# EAGLE board Spandan (EAGLE 7.7.0)
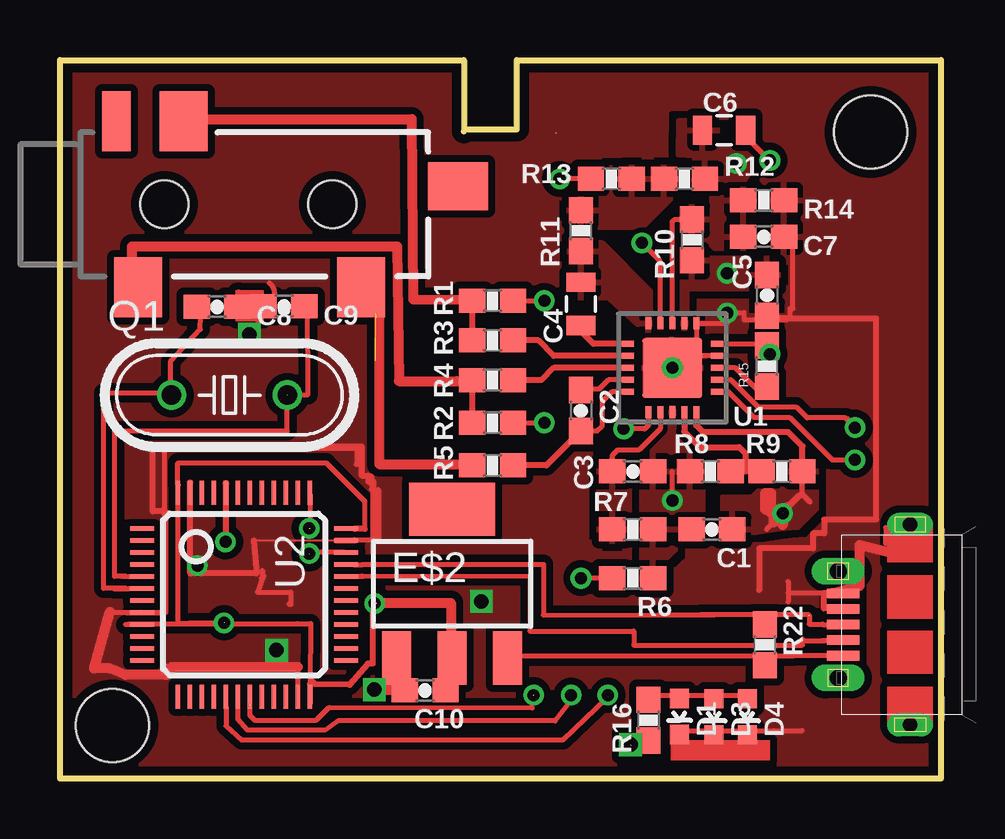
[diagram p0: board, top side]
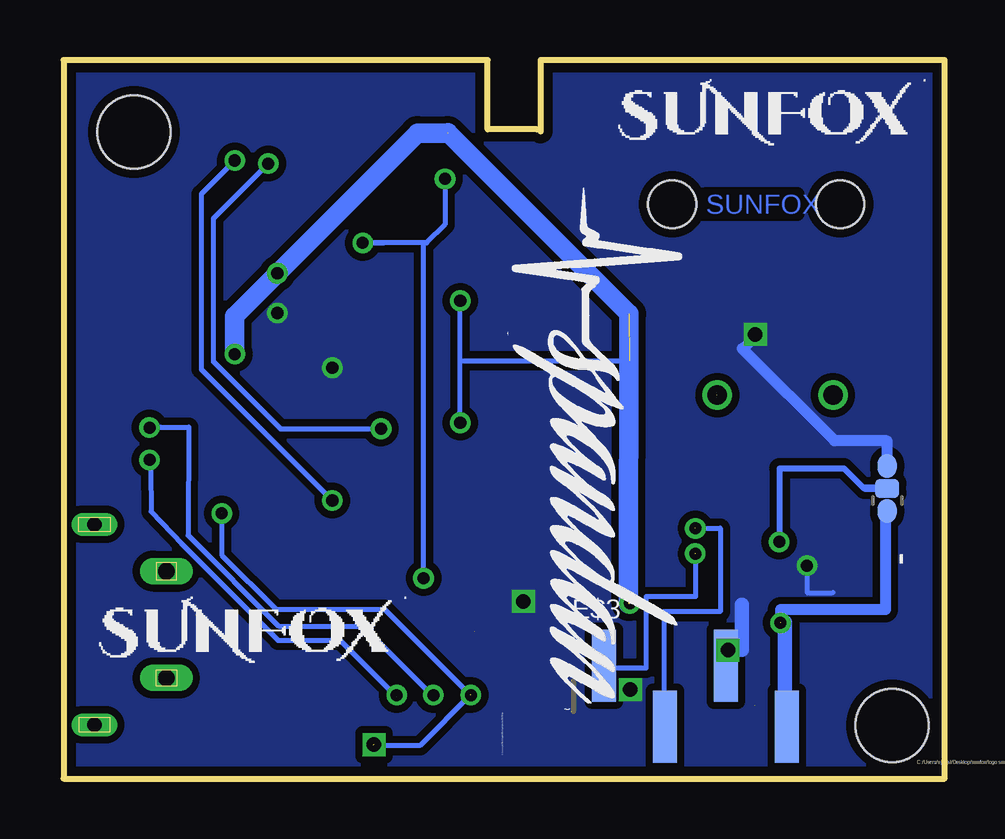
[diagram p1: board, bottom side, seen from below]

Size 36.73 x 29.95 mm. Coordinates in mm from the lower left corner, seen from the top.
Outline: 16.84,26.98 16.84,29.95 0,29.95 0,0 36.73,0 36.73,29.95 19.05,29.95 19.05,27.05 16.99,27.05
Copper layers (1*16): Top 0.0356mm / dielectric 1.5011mm / Bottom 0.0356mm
Design rules "LC_Eagle": minimum track width 8mil, minimum drill 10mil, track to track 8mil, track to pad 8mil, pad to pad 8mil, via to via 8mil, smd to smd 8mil, copper to edge 15mil, drill to drill 8mil, minimum pad ring 7mil, minimum via ring 7mil, stop-mask expansion 4mil, vias tented up to drill 0mil, thermal gap 10mil
Holes 3.05 mm at 33.8,26.94 2.19,2.22

## Footprints (pad centres in the part's own frame; a part is rotated, then mirrored left to right if it is on the bottom)
C0R-JMP = smd 0.8 x 1: 1 0,0.938; 3 0,-0.938 | smd 1 x 0.8: 2 0,0
0603-CAP = smd 1.1 x 1: 1 -0.85,0; 2 0.85,0
0805 = smd 0.8 x 1.2: 1 -0.9,0; 2 0.9,0
LED-0603 = smd 0.8 x 0.8: A 0,-0.75; C 0,0.75
47589-0001 = smd 1.35 x 0.4: 1 2.8,1.3; 2 2.8,0.65; 3 2.8,0; 4 2.8,-0.65; 5 2.8,-1.3 | drill 0.6 pad 0.95 long: CASING1 0,4.175; CASING2 0,-4.175 | drill 0.7 pad 1.1 long: CASING3 3,2.225; CASING4 3,-2.225
SOT223 = smd 1.219 x 2.235: 1 -2.311,-3.099; 2 0,-3.099; 3 2.311,-3.099 | smd 3.6 x 2.2: 4 0,3.099
1X04_SMT = smd 1 x 3: 1 -3.81,1.27; 2 -1.27,-1.27; 3 1.27,1.27; 4 3.81,-1.27
AUDIO-JACK-3.5MM-SMD = smd 2 x 2.5: RING 4.3,3.45; SLEEVE 2.4,-3.45; TIP 11.7,-3.45 | smd 1.2 x 2.5: RSH 1.5,3.45 | smd 2.5 x 2: TSH 15.75,0.75 | hole 2: 3.5,0; 10.5,0
HC49/S = drill 0.813: 1 -2.413,0; 2 2.413,0
0603-RES = smd 1.1 x 1: 1 -0.85,0; 2 0.85,0
LFCSP_20 = smd 0.5 x 0.25: 1 -1.85,1; 2 -1.85,0.5; 3 -1.85,0; 4 -1.85,-0.5; 5 -1.85,-1; 11 1.85,-1; 12 1.85,-0.5; 13 1.85,0; 14 1.85,0.5; 15 1.85,1 | smd 0.25 x 0.5: 6 -1,-1.85; 7 -0.5,-1.85; 8 0,-1.85; 9 0.5,-1.85; 10 1,-1.85; 16 1,1.85; 17 0.5,1.85; 18 0,1.85; 19 -0.5,1.85; 20 -1,1.85 | smd 2.5 x 2.5: PAD 0,0
LQFP48 = smd 0.2 x 1: 1 -2.75,-4.25; 2 -2.25,-4.25; 3 -1.75,-4.25; 4 -1.25,-4.25; 5 -0.75,-4.25; 6 -0.25,-4.25; 7 0.25,-4.25; 8 0.75,-4.25; 9 1.25,-4.25; 10 1.75,-4.25; 11 2.25,-4.25; 12 2.75,-4.25; 25 2.75,4.25; 26 2.25,4.25; 27 1.75,4.25; 28 1.25,4.25; 29 0.75,4.25; 30 0.25,4.25; 31 -0.25,4.25; 32 -0.75,4.25; 33 -1.25,4.25; 34 -1.75,4.25; 35 -2.25,4.25; 36 -2.75,4.25 | smd 1 x 0.2: 13 4.25,-2.75; 14 4.25,-2.25; 15 4.25,-1.75; 16 4.25,-1.25; 17 4.25,-0.75; 18 4.25,-0.25; 19 4.25,0.25; 20 4.25,0.75; 21 4.25,1.25; 22 4.25,1.75; 23 4.25,2.25; 24 4.25,2.75; 37 -4.25,2.75; 38 -4.25,2.25; 39 -4.25,1.75; 40 -4.25,1.25; 41 -4.25,0.75; 42 -4.25,0.25; 43 -4.25,-0.25; 44 -4.25,-0.75; 45 -4.25,-1.25; 46 -4.25,-1.75; 47 -4.25,-2.25; 48 -4.25,-2.75

## Placement (x,y rotation side)
'  [C0R-JMP]  2.39,12.1 180 bottom
C1  1.5nF  [0603-CAP]  27.18,10.39 180 top
C2  1nF  [0603-CAP]  21.72,15.34 270 top
C3  10nF  [0603-CAP]  23.88,12.8 180 top
C4  0.33uF  [0805]  21.72,19.79 90 top
C5  0.1uF  [0603-CAP]  29.47,20.14 270 top
C6  0.33uF  [0805]  27.69,27.03 0 top
C7  0.1uf  [0603-CAP]  29.34,22.58 0 top
C8  22pf  [0603-CAP]  6.55,19.66 0 top
C9  22pf  [0603-CAP]  9.34,19.68 0 top
C10  22uF  [0603-CAP]  15.22,3.68 180 top
D1  RED  [LED-0603]  25.83,2.6 180 top
D3  RED  [LED-0603]  27.26,2.58 180 top
D4  RED  [LED-0603]  28.66,2.58 180 top
E$1  [47589-0001]  35.44,6.42 180 top
E$2  [SOT223]  16.34,8.12 0 top
E$3  [1X04_SMT]  10.39,3.43 0 bottom
JP2  [AUDIO-JACK-3.5MM-SMD]  0.85,23.93 0 top
Q1  [HC49/S]  7.07,15.98 0 top
R1  10M  [0603-RES]  18.03,19.91 0 top
R2  10M  [0603-RES]  18.03,14.83 0 top
R3  180k  [0603-RES]  18.03,18.26 0 top
R4  180k  [0603-RES]  18.03,16.61 0 top
R5  360k  [0603-RES]  18.03,13.06 180 top
R6  1M  [0603-RES]  23.88,8.36 180 top
R7  1M  [0603-RES]  23.88,10.39 180 top
R8  100k  [0603-RES]  27.11,12.8 180 top
R9  1M  [0603-RES]  30.1,12.8 180 top
R10  10M  [0603-RES]  26.35,22.45 90 top
R11  10M  [0603-RES]  21.72,22.83 90 top
R12  1.4M  [0603-RES]  26.04,24.99 0 top
R13  10M  [0603-RES]  22.99,24.99 0 top
R14  10M  [0603-RES]  29.34,24.1 180 top
R15  10K  [0603-RES]  29.47,17.2 90 top
R16  1k  [0603-RES]  24.53,2.44 270 top
R22  4k7  [0603-RES]  29.38,5.58 270 top
U1  AD8232  [LFCSP_20]  25.53,17.12 0 top
U2  [LQFP48]  7.67,7.67 270 top

## Library data of the parts
' = jump-0r-smd
C1-C3 C5 C7-C10 R1-R14 R22 = SparkFun-Passives
C4 C6 = SparkFun-Capacitors
D1 D3 D4 = SparkFun-LED
E$1 = con-molex-usb
E$2 = transistor-pnp
E$3 = microbuilder
JP2 = SparkFun-Connectors; PROD_ID: CONN-10353
Q1 = crystal
R15 = SparkFun-Resistors; PROD_ID: RES-00824
R16 = SparkFun-Resistors
U1 = AD8232
U2 = micro-fujitsu

## Nets
3.3V: C5.1 R1.2 R2.2 R10.1 U1.15 U1.17
GND: C5.2 C7.2 R14.1 U1.14 U1.16 U1.PAD
LA: R1.1 R3.1
LO+: U1.11
LO-: U1.12
N$1: R3.2 U1.2
N$2: R4.2 U1.3
N$3: C3.2 R7.2 U1.7
N$4: C4.2 R11.1 U1.20
N$5: C7.1 R10.2 R14.2 U1.18
N$7: R8.1 R9.2 U1.9
N$8: R6.2 R13.1 U1.19
N$9: C1.2 R6.1 R7.1
N$13: C4.1 U1.1
N$14: R11.2 R12.1 R13.2
N$16: C6.1 R12.2 U1.6
N$17: C2.1 U1.4
N$18: C2.2 R5.1 U1.5
RA: R2.1 R4.1
REFOUT: C3.1 C6.2 R8.2 U1.8
SDN: U1.13
SIGNAL_OUT: C1.1 R9.1 U1.10

## Tracks (layer width: path | path; a pad name or v marks a point on that pad's centre or on a via)
3.3V  (via drill 0.5, 0.51)  (6 unrouted)
  Top 0.178: 4.93,6.46 4.94,6.44 4.94,6.46 | 9.89,6.44 9.89,6.46
  Top 0.203: U1.15 29.16,18.12 v29.59,17.69 | 12.3,10.42 12.71,10.42 | 12.7,10.41 12.7,11.56 11.1,13.16 4.91,13.16 4.91,12.26 4.93,12.23 4.93,6.46 2.86,6.46 | 10.63,3.94 10.45,3.94 | 10.42,3.1 10.42,3.95 10.45,6.46 9.89,6.46 4.94,6.46 4.95,6.48 5.37,6.48 5.39,6.5 v6.84,6.5 | R2.2 v20.19,14.83 | R1.2 v20.19,19.91
  Top 0.254: 12.3,10.42 12.3,10.41 12.7,10.41 | 10.48,4.1 10.63,3.94 12.07,3.91 12.81,4.78 12.83,4.79 13.05,4.79 13.05,7.22 13.11,7.28 | 10.45,3.94 10.42,3.95
  Top 0.406: 13.17,7.33 16.3,7.33 16.3,4.49
  Bottom 0.203: 20.19,17.42 13.13,17.42 13.13,17.43 | v20.19,14.83 20.19,17.42 | 20.19,17.42 v20.19,19.91 | 20.2,17.42 20.19,17.42
  Bottom 0.406: 13.18,7.29 13.15,7.29 v13.12,7.31
  Bottom 0.457: 6.84,6.51 6.84,7.05 2.47,7.05 2.47,11.17 2.4,11.17
  Bottom 0.61: 6.84,6.51 6.66,6.51 6.66,2.57
  Bottom 0.813: v29.59,17.69 29.59,19.28 v27.81,21.06 21.97,26.9 20.7,26.9 | 13.18,7.29 13.16,19.37 20.7,26.91
  pour Top (isolate 0.203): 25.91,18.77 26.16,18.77 26.16,20.42 29.97,20.42 29.97,21.69 25.91,21.69
BOOT  (via drill 0.5)
  Top 0.254: 6.93,12.31 6.9,12.31 v6.9,9.87
  Bottom 0.254: v6.9,9.87 6.87,9.87 6.87,12.93 4.2,12.93 3.35,12.08 2.27,12.08 | 2.27,12.08 2.25,12.11 | 6.88,12.93 4.19,12.93 3.41,12.15 2.31,12.15 2.27,12.11 2.27,12.08 | 2.27,12.08
D+  (1 unrouted)
  Top 0.203: 12.24,8.92 12.61,8.92 12.61,8.93 20.16,8.93 20.16,6.81 20.15,6.81 20.15,6.82 24.96,6.82 26.7,6.82 | 26.7,6.82 27.27,6.83 | 31.22,6.8 31.22,6.84 26.7,6.84 26.7,6.82 | 31.81,6.42 31.69,6.42 | 31.81,6.42 32.35,6.42 | 31.81,6.42 31.78,6.44 31.23,6.44 31.23,6.81
D-  (2 unrouted)
  Top 0.203: 12.27,8.43 12.62,8.43 12.61,8.44 | 12.61,8.44 19.59,8.46 19.59,6.15 | 12.61,8.44 12.58,8.44 | 30.95,5.83 30.95,5.56 23.92,5.56 23.92,6.15 19.6,6.15 | 32.12,5.75 31.86,5.75 | 31.86,5.75 31.75,5.75 | 31.86,5.75 31.86,5.77 | 31.86,5.75 | 30.94,5.75 31.86,5.75
GND  (via drill 0.5, 0.5 pad 0.25, 0.51, 0.6)
  Top 0.102: 11.53,9.93 8.08,9.92
  Top 0.203: 3.09,6.92 4.34,6.9 | 4.34,6.9 3.36,6.93 | 12.29,9.93 11.53,9.93 12.32,9.91 | 8.72,19.33 8.72,19.36 arc90 8.52,19.55 8.52,19.43 8.27,19.58 | 8.72,20.66 arc-90 8.85,19.9 7.74,19.9 8.27,19.58 | 32.06,7.08 31.83,7.08 31.83,7.2 31.83,7.71 | 30.36,8.21 30.36,7.73 | 32.21,7.74 31.37,7.74 31.37,7.73 30.36,7.73 | 12.26,9.95 13.06,9.95 13.07,9.93 | 4.33,6.95 4.33,6.92 2.76,6.92 4.34,6.9 | 34.86,10.06 34.42,10.47 34.41,9.8 | v5.73,8.88 5.89,8.55 | 9.92,3.25 9.92,4.65 | 2.08,6.94 4.41,6.94 4.41,9.57 4.37,9.57 4.37,13.77 12.36,13.77 12.36,13.1 12.6,13.1 12.6,12.61 12.99,12.61 12.99,12.04 13.27,12.04 13.27,9.97 | 8.44,8.68 8.4,8.34 8.48,8.48 8.23,7.78 9.62,7.78 9.62,7.25 9.56,7.25 9.56,7.31 | v7.9,18.52 8.27,18.52 8.27,19.58 | 30.36,7.73 30.36,7.37 | 25.72,2 29.77,2 30.94,2 | U1.14 25.47,17.62 | 30.56,22.41 30.56,19.59 30.45,19.59 30.45,19.18 30.29,19.18 30.29,19.11 28.52,19.11 28.52,19.42 27.81,19.42 27.81,18.97 U1.16 26.53,18.12 U1.PAD 26.03,17.62
  Top 0.254: 5.41,12.34 5.43,12.34 5.43,8.55 5.89,8.55 8.19,8.55 8.08,9.92 | 11.53,9.93 12.26,9.93 12.26,9.95 | 4.33,6.95 4.4,6.95 4.4,11.14 3.87,11.14 3.87,13.85 12.57,13.85 12.57,12.63 12.86,12.63 12.86,12.38 13.06,12.38 13.06,9.95 | 32.21,7.74 31.83,7.74 31.83,7.2 | 30.29,19.18 29.28,19.18 29.28,19.29 | 30.45,19.18 34.02,19.18 34.02,10.79 31.86,10.79 31.86,10.22 31.39,10.22 31.39,9.6 29.15,9.6 29.15,7.86
  Top 0.406: 32.21,7.74 33.34,8.04 33.34,9.75 34.6,9.44 34.86,10.06 | 9.92,4.65 4.66,4.65 4.66,4.59 4.41,4.59 4.41,4.32 2.73,4.32 2.07,4.6 1.42,4.6 2.08,6.94 | v13.1,3.71 14.05,3.71 14.05,5.22
  Bottom 0.203: v5.73,8.88 5.73,7.75 4.65,7.75
  Bottom 0.254: v13.1,3.71 v13.1,3.7
  Bottom 0.457: 2.4,13.02 2.39,13.02 2.39,14.06 2.4,14.07 4.58,14.07 8.43,17.92 7.83,18.45 v7.9,18.52
  Bottom 0.61: 8.92,5.38 8.45,5.38 8.45,7.24
  other vias: 17.56,7.39 9.03,5.36 27.81,19.41 25.53,17.12
  pour Top (isolate 0.305, rank 6): 0.02,29.92 36.7,29.92 36.71,-0.03 0.03,-0.03
  pour Bottom (isolate 0.305, rank 6): 0.01,29.98 36.73,29.9 36.74,-0.02 0.02,-0.02
LA
  Top 0.178: R1.1 17.16,19.98 16.99,19.98 16.87,19.96
  Top 0.254: R1.1 R3.1
  Top 0.406: 5.45,27.48 14.66,27.48 14.72,19.98 16.87,19.96 16.87,19.92
LED_OUT
  Top 0.203: 24.53,3.47 28.83,3.47
LO+  (via drill 0.5)  (1 unrouted)
  Top 0.203: 28.86,15.13 27.87,16.12 27.35,16.12 27.36,16.12 U1.11 | 28.86,15.13 | 28.86,15.13 28.93,15.06 30.42,15.06 32.19,13.29 33.09,13.29 33.1,13.28 | 33.1,13.28 33.11,13.27 | 6.92,3 6.92,2.2 7.57,1.62 20.97,1.62 22.81,3.38 22.85,3.42 | 33.1,13.28 v33.15,13.28
  Top 0.406: 22.85,3.42 22.81,3.42 22.81,3.38
  Bottom 0.203: 33.1,13.28 33.1,13.24 | 33.1,13.24 33.1,12.9 33.08,11.13 31.79,9.77 27.78,5.76 25.2,5.77 22.86,3.43 | v33.15,13.28 33.1,13.24
  Bottom 0.406: 22.85,3.43 22.84,3.43 v22.84,3.48 | 22.86,3.43 22.85,3.43 | 22.85,3.43 22.85,3.42
LO-  (via drill 0.5)
  Top 0.191: 7.42,2.91 7.42,2.73
  Top 0.203: 32.74,15.04 32.77,15.04 33.16,14.64 | 21.33,3.47 21.33,3.3 20.64,2.41 11.59,2.41 11.04,2.03 7.82,2.03 7.42,2.47 7.42,2.91 | U1.12 27.35,16.62 27.35,16.63 27.96,16.63 29.1,15.49 30.7,15.49 31.15,15.04 32.74,15.04 | v33.15,14.63 32.74,15.04
  Top 0.406: 21.33,3.47 v21.31,3.47 v21.31,3.48
  Bottom 0.203: 33.16,14.65 33.08,14.65 | 33.08,14.65 32.7,14.65 31.51,14.65 31.53,10.14 27.76,6.36 24.24,6.36 21.3,3.42 | v33.15,14.63 33.12,14.65 33.12,14.68 33.08,14.65
  Bottom 0.406: 21.3,3.42 21.31,3.42 v21.31,3.48
N$1
  Top 0.254: U1.2 20.58,17.62 19.94,18.26 R3.2
N$2
  Top 0.254: U1.3 20.57,17.12 20.07,16.61 R4.2
N$3
  Top 0.203: U1.7 25.03,14.59 24.13,13.69 23.24,13.69 23.03,13.48 C3.2
  pour Top (isolate 0.203): 22.48,13.31 23.75,13.31 23.75,9.88 22.48,9.88
N$4
  pour Top (isolate 0.203): 24.64,18.64 24.64,20.29 22.61,22.33 21.21,22.33 21.21,20.04 22.86,20.04 24.38,18.64
N$5
  Top 0.203: U1.18 25.53,23.22 25.61,23.3 R10.2
  pour Top (isolate 0.203, rank 2): 27.18,24.61 28.96,24.61 28.96,22.07 27.31,22.07 26.92,22.45 25.91,22.45 25.91,23.85 27.18,23.85
N$7
  Top 0.254: U1.9 26.03,14.46 26.67,13.82 28.32,13.82 28.57,13.56 28.57,12.8 | R8.1 28.57,12.8 | R9.2 28.57,12.8
N$8  (via drill 0.51)
  Top 0.203: U1.19 25.03,21.56 v24.26,22.33 | R13.1 v20.83,24.99 | R6.2 v21.72,8.36
  Bottom 0.203: 23.37,22.33 v24.26,22.33 21.72,22.33 | 21.72,22.33 21.59,22.33 20.83,23.09 v20.83,24.99 | v21.72,8.36 21.72,22.33
N$9
  pour Top (isolate 0.203): 24.26,10.77 27.18,10.77 26.53,10.42 24.62,8.51 24.26,7.85
N$13
  Top 0.254: U1.1 22.24,18.12 21.72,18.64 C4.1
N$14
  pour Top (isolate 0.203, rank 2): 22.99,25.5 25.78,25.5 25.78,24.49 24.26,22.96 21.21,22.96 21.21,24.36 22.99,24.36
N$16  (via drill 0.51)
  Top 0.203: 26.92,24.99 R12.2 | U1.6 24.53,14.72 24.38,14.58 v23.49,14.58
  Bottom 0.203: v28.19,25.63 30.48,23.34 30.48,17.37 27.69,14.58 v23.49,14.58
  pour Top (isolate 0.254): 26.42,24.74 28.45,24.74 28.83,25.37 28.83,25.88 28.45,26.26 27.56,26.26 27.43,26.39 27.43,27.41 25.78,27.41 25.76,26 26.45,25.97
N$17
  Top 0.203: U1.4 22.87,16.62 22.48,16.23 21.72,16.23 C2.1
N$18
  Top 0.203: C2.2 22.39,14.49 22.61,14.71 22.61,15.72 23,16.12 U1.5 | R5.1 18.92,13.06
  Top 0.254: C2.2 20.28,13.06 18.92,13.06
OSC1
  Top 0.203: 4.61,16.09 1.81,16.09 1.81,7.93 2.77,7.93 2.24,7.93 2.72,7.93 | 4.61,16.09 4.61,15.96 | 4.62,16.07 4.62,17.4 5.85,18.73 5.89,19.82 | 2.52,7.92 2.72,7.93 | 2.72,7.93 2.88,7.93 | 4.61,16.09 4.62,16.07 | 4.62,16.07 4.62,16.02
OSC2  (via drill 0.6)  (1 unrouted)
  Top 0.203: 2.77,8.43 2.27,8.43 2.27,14.49 9.47,14.49 9.47,15.98 v9.47,15.98 v9.48,15.98 | 2.66,8.44 2.77,8.43 | 2.88,8.42 2.54,8.44 2.77,8.43 | 9.49,16.01 10.33,16.01 10.31,19.72
PWR
  Top 0.203: 32.03,5.13 30.59,5.13 30.57,5.11 18.95,5.11
  Top 0.254: 18.94,5.11 18.95,5.11
  Top 0.406: 18.94,5.11 18.92,5.11 18.92,5.5
RA
  Top 0.178: R4.1 17.16,16.68 16.54,16.57
  Top 0.254: R4.1 R2.1
  Top 0.406: 3.26,20.59 3.01,20.57 3.01,22.18 14.06,22.18 14.13,16.57 16.54,16.57 17.1,16.57
REFOUT  (via drill 0.51)
  Top 0.203: C6.2 28.57,26.77 v29.59,25.76 | v25.53,11.6 25.53,12.8
  Top 0.254: R8.2 26.29,12.93
  Bottom 0.203: v29.59,25.76 30.99,24.36 30.99,17.06 v25.53,11.6
  pour Top (isolate 0.203, rank 2): 25.27,15.47 25.78,15.47 25.78,14.07 26.29,13.56 26.8,13.56 26.8,11.02 24.26,11.02 24.26,13.44 25.27,14.45
RL
  Top 0.406: 13.28,19.56 13.31,19.56 13.31,13.11 16.86,13.11 16.86,13.15
S$2
  Top 0.203: 3.05,6.42 2.74,6.42
S$5  (via drill 0.5)  (2 unrouted)
  Top 0.203: 10.41,11.84 10.42,11.84 10.42,10.44
  Bottom 0.203: 10.42,10.44 9.35,10.44 9.35,6.97 11.71,6.97 11.71,1.5
  other vias: 10.39,10.43
S$6  (via drill 0.5)  (2 unrouted)
  Top 0.203: 11.86,9.44 10.4,9.44 v10.4,9.37
  Bottom 0.203: v10.4,9.37 v10.39,9.37 10.39,7.59 12.44,7.59 12.44,4.61 14.29,4.61 14.29,4.62
SDN
  Top 0.203: 29.19,16.1 28.16,17.12 U1.13
SIGNAL_OUT  (via drill 0.5, 0.6)  (5 unrouted)
  Top 0.203: 7.92,3.02 7.92,3.06 | 28,10.61 27.81,10.08 27.94,10.33 27.94,10.53 27.59,10.69 | 7.92,3.06 7.92,2.64 8.11,2.44 10.68,2.44 11.15,2.91 11.23,2.97 19.69,2.95 19.74,3.46 | 31.28,11.53 30.99,11.81 | 30.99,11.81 30.8,11.81 30.43,11.44 | 30.99,11.81 30.95,11.86 R9.1 30.95,11.89 30.14,11.07 | 30.43,11.44 30.14,11.14 | 30.14,11.14 30.14,11.07 | v30.14,11.06 30.14,10.52 30.13,10.52 30.13,10.56 | v30.13,11.06 v30.14,11.06 | 30.13,11.07 29.74,10.68 29.45,10.39 | 30.14,11.07 30.13,11.07 | 30.13,11.07 v30.13,11.06 | v30.14,11.06 arc-90 v30.13,11.06 | v30.14,11.06 30.14,11.07 | 30.14,11.14 arc-90 30.43,11.44 | 23.82,1.4 24.61,1.4
  Top 0.254: U1.10 26.53,14.72 26.8,14.45 30.35,14.45 30.95,13.86 R9.1
  Top 0.406: 19.74,3.46 19.75,3.46 v19.75,3.49 | 30.13,10.56 v30.13,11.06 30.13,11.07 | 30.14,11.07 30.13,11.07 | 30.13,11.07 29.65,11.07 29.65,11.9 29.39,11.9 29.39,11.21 29.74,11.21 29.74,10.68
  Bottom 0.203: 30.14,11.07 30.14,9.32 27.87,7.05 23.35,7.05 19.77,3.47 | 19.75,3.52 19.75,3.51 21.88,1.38 23.81,1.38 23.82,1.4
  Bottom 0.406: 19.77,3.47 v19.75,3.47 v19.75,3.49
  other vias: 23.79,1.42
  pour Top: 30.39,13.3 31.48,13.3 31.54,13.25 31.54,11.25 30.74,10.45 29.99,10.39 27.65,10.03 27.63,10.01 27.63,11.75 28.86,11.75 29.11,12 30.03,12 30.37,12.34
(copper drawn outside any net)
  shapes: Top area x3

## Text on the board
Bottom: SUNFOX
bNames: C:/Users/ujjwal/Desktop/sunfox/spandan_sunfox.bmp | C:/Users/ujjwal/Desktop/spandan009.bmp | C:/Users/ujjwal/Desktop/sunfox/logo small.bmp